# Altium PCB regularCharger.PcbDoc
Units mm, origin at the board's own origin, x right, y up, seen from the top; angles counter-clockwise.
Board outline 152.4 x 101.6 mm, 2 copper layers (Top Layer, Bottom Layer); 12 components, 7 nets, 32 pads, 0 vias.
Unrouted connection lines stored in the file: 13.
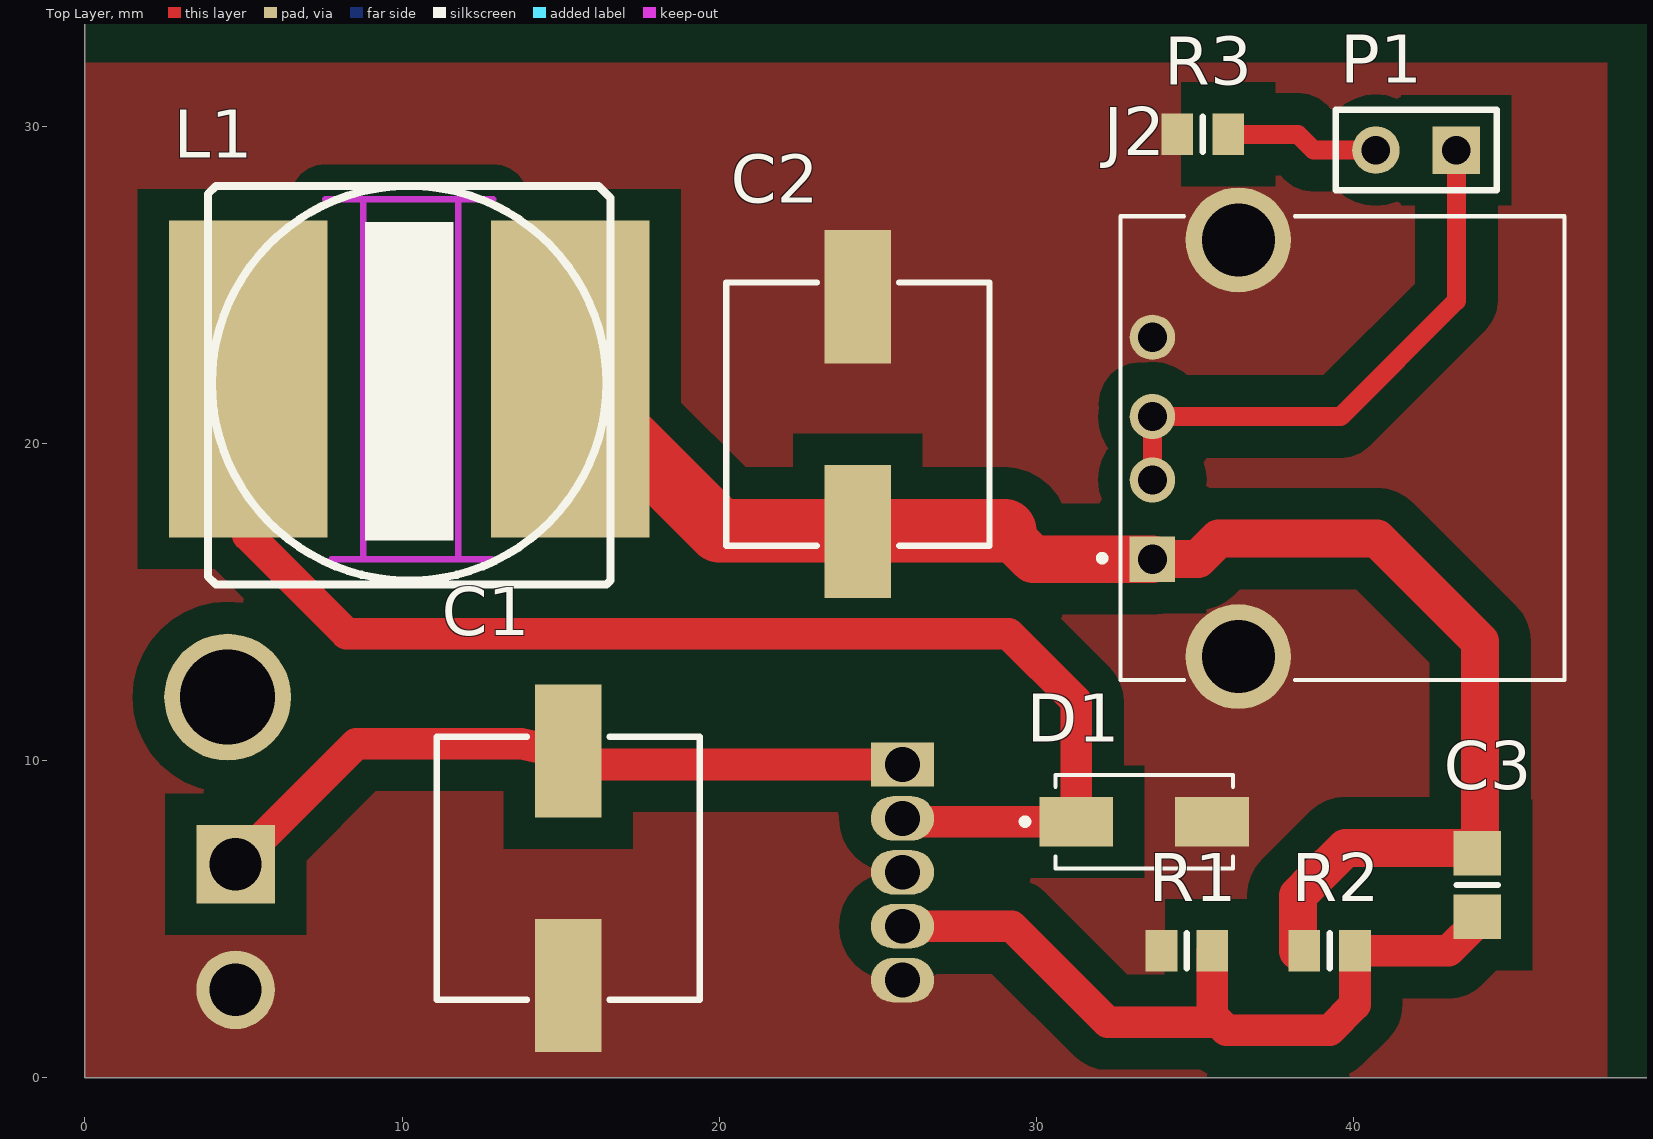
[diagram p0: Top Layer view]
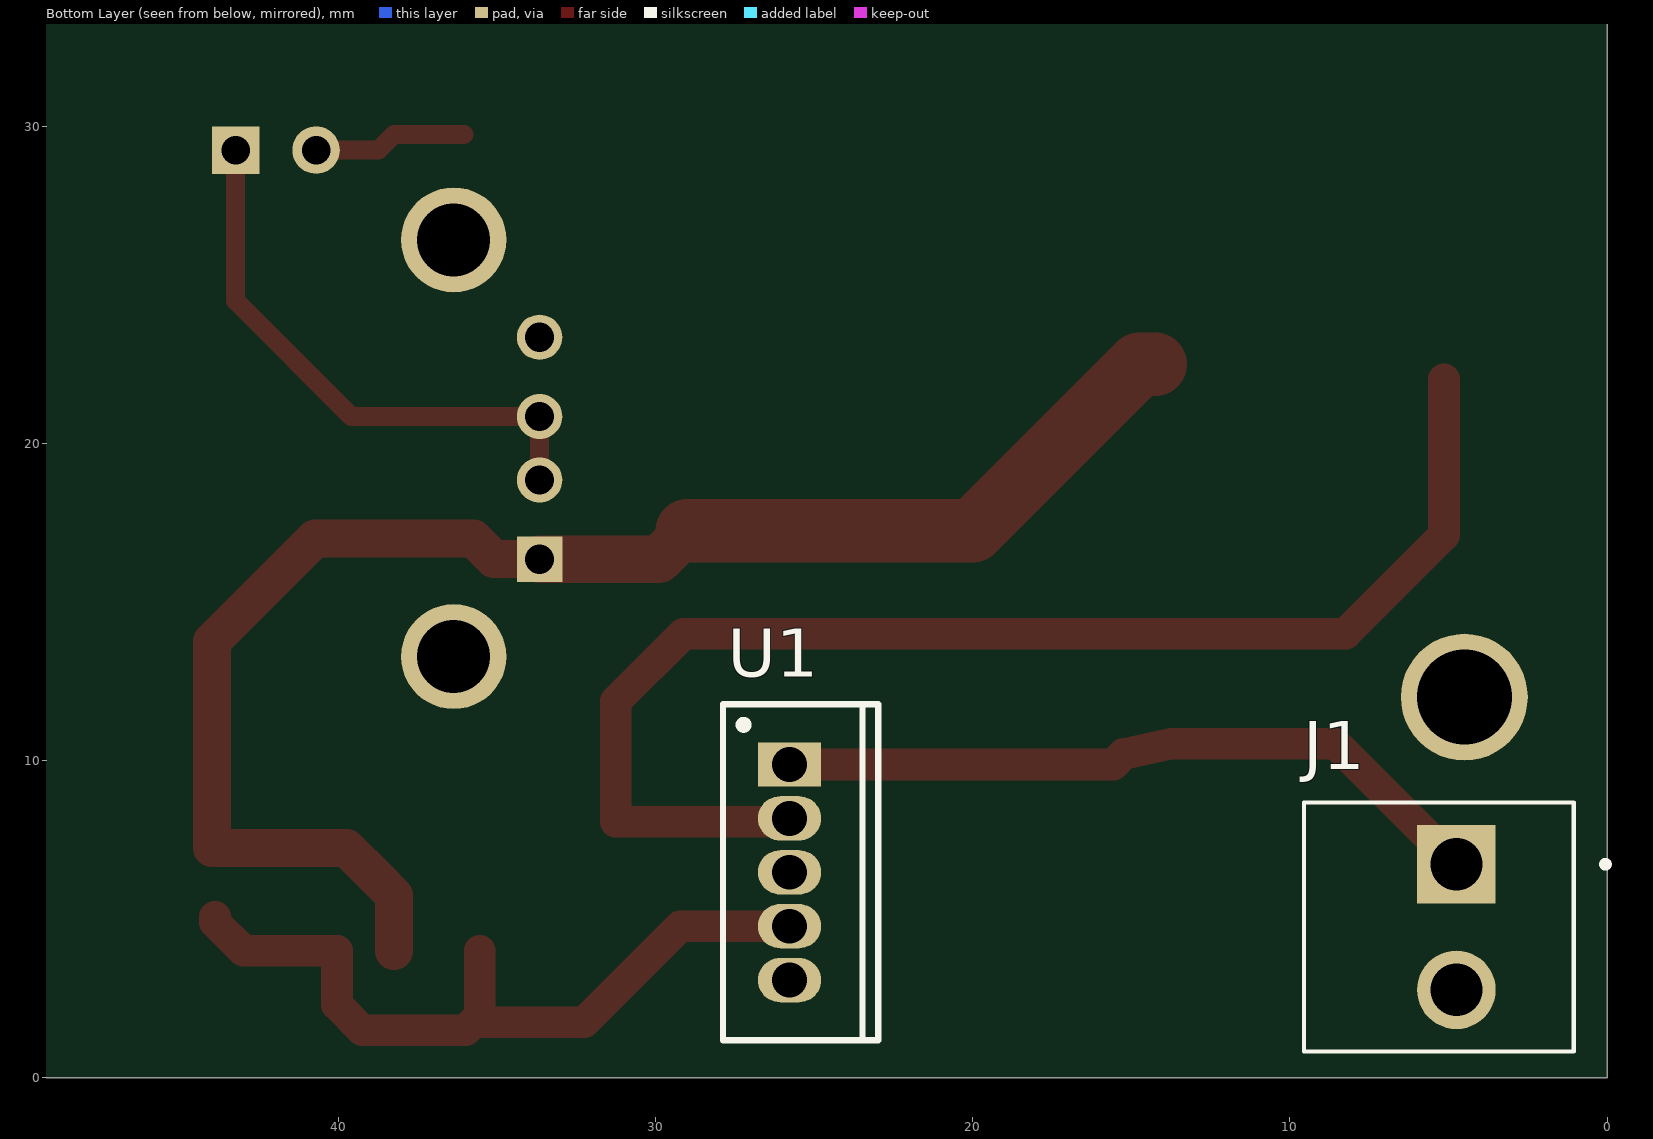
[diagram p1: Bottom Layer view, seen from below]

## Layer stack, top to bottom
Top Solder: solder mask 0.0102, Solder Resist, Dk 3.5
Top Layer: signal copper 0.0356
Dielectric 1: dielectric 0.32, FR-4, Dk 4.8
Bottom Layer: signal copper 0.0356
Bottom Solder: solder mask 0.0102, Solder Resist, Dk 3.5

## Board outline
0,0 152.4,0 152.4,101.6 0,101.6

## Design rules (kind name [scope] priority, off if disabled: settings)
Clearance [All] p1: gap=1 ignorepadtopadclearanceinfootprint=FALSE
PolygonConnect [All] p1: connectstyle=Direct reliefconductorwidth=0.254 reliefentries=4 polygonreliefangle="90 Angle" airgapwidth=0.254
RoomDefinition regularCharger [InComponentClass('regularCharger')] p1: confinementstyle=ConfineIn formatcopy=TRUE lockcomponents=FALSE outline 153.6,1.85 156.6,1.85 156.6,10.1 153.6,10.1
RoutingVias [All] p1: holewidth=0.711 width=1.27 viastyle="Through Hole" minholewidth=0.711 minwidth=1.27 maxholewidth=0.711 maxwidth=1.27
SolderMaskExpansion [All] p1: expansion=0.102
Width [All] p1: maxlimit=0.254 minlimit=0.254 preferedwidth=0.254
30 further rules are at their usual default settings.

## Components (designator, comment, footprint, x,y, rotation, side; value= is the part's Value field where it differs from the comment)
C1 "100uf" *HAV(F) 15.24,6.604 r270 top
C2 "220uf" *HAV(F) 24.375,20.925 r90 top
C3 "Cap" 6-0805_M 43.9,6.075 r270 top value=10nf
D1 "S1M" *DIOM5227X270N_S1M(Primary) 33.4,8.075 r0 top
J1 "6-1123723-2" *TE_6-1123723-2 4.75,4.75 r270 bottom
J2 "1-292303-1" *TE_1-292303-1_1-292303-1(Primary) 39.652,19.85 r90 top
L1 "Inductor" IND_SMD-13.0mm 10.225,21.9 r180 top value=33uH
P1 "Header 2" HDR1X2 43.25,29.25 r180 top
R1 "Res1" 6-0805_L 34.75,4 r0 top value=1K
R2 "Res1" 6-0805_L 39.25,4 r180 top value=3K
R3 "Res1" 6-0805_L 35.25,29.75 r0 top value=10K
U1 "LM2596-ADJ" T05A 25.781,6.477 r270 bottom

## Footprints (in the part's own frame and the unit in brackets; to place one, negate y for a bottom-side part, rotate by r counter-clockwise, add the part's x,y. Pads: shape width x height; smd on the part's side, far side on the other; paste and mask are expansions set on the pad)
6-0805_L [mm] "Chip Resistor, Body 2.0x1.2mm, IPC High Density"
  rect 1x1.3 smd: 1(-0.8,0) 2(0.8,0)
  silkscreen extent 0,-0.55 0,0.55, body extent -1.07,-0.7 1.07,0.7, height 0.7
6-0805_M [mm] "Chip Resistor, Body 2.0x1.2mm, IPC Low Density"
  rect 1.4x1.5 smd: 1(-1,0) 2(1,0)
  silkscreen extent 0,-0.65 0,0.65, body extent -1.07,-0.7 1.07,0.7, height 0.7
*DIOM5227X270N_S1M(Primary) [mm]
  rect 2.33x1.56 smd: A(2.14,0) C(-2.14,0)
  silkscreen extent -3.85,-1.48 2.8,1.48
*HAV(F) [mm]
  rect 4.2x2.1 smd: 1(-3.7,0) 2(3.7,0)
  silkscreen extent -4.15,-4.15 4.15,4.15
*TE_1-292303-1_1-292303-1(Primary) [mm]
  rect 1.428x1.428 hole 0.92: 1(-3.5,5.99)
  round 1.428 hole 0.92: 2(-1,5.99) 3(1,5.99) 4(3.5,5.99)
  round 3.316 hole 2.3: S1(-6.57,3.28) S2(6.57,3.28)
  silkscreen extent -7.31,-7 7.31,7.67
*TE_6-1123723-2 [mm]
  rect 2.475x2.475 hole 1.65: 1(-1.98,0)
  round 2.475 hole 1.65: 2(1.98,0)
  silkscreen extent -3.93,-4.8 3.93,4.8
HDR1X2 [mm] "Connector; Header; 2 Position"
  rect 1.5x1.5 hole 0.9: 1(0,0)
  round 1.5 hole 0.9: 2(2.54,0)
  silkscreen extent -1.27,-1.27 3.81,1.27
IND_SMD-13.0mm [mm]
  rect 5x10 smd: 1(-5.08,-0.127) 2(5.08,-0.127)
  Top Layer keep-out lines w0.2: 2.65,-5.8 -2.65,-5.8 ; 2.45,5.55 -2.6,5.55 ; 1.45,5.5 1.45,-5.75 ; -1.55,5.55 -1.55,-5.8
  silkscreen extent -6.35,-6.22 6.35,6.35, body extent -6.2,-6.3 6.3,6.2, height 6.1
T05A [mm] "TO, Thru-Hole, Vertical, Heatsink Mounted; 5 In-Line Leads; Pitch 1.70 mm"
  rect 1.4x2 hole 1.1: 1(-3.4,0)
  oval 1.4x2 hole 1.1: 2(-1.7,0) 3(0,0) 4(1.7,0) 5(3.4,0)
  silkscreen extent -5.3,-2.1 5.3,2.8, body extent -5.35,-2.15 5.35,2.85, height 15.9

## Part data
C1 C2: library part EEEHA1H101UP, "Cap Aluminum 100uF 50V 20% _8 X 10.2mm_ SMD 110mA 2000 hr 105°C T/R", Package="Radial Panasonic Electronic", Availability=Unavailable, MF="Panasonic Electronic", MP=EEEHA1H101UP, Price=None, SnapEDA_Link=https://www.snapeda.com/parts/EEEHA1H101UP/Panasonic%20Electronic%20Components/view-part/?ref=snap
C3: "Capacitor", LatestRevisionDate=17-Jul-2002, LatestRevisionNote="Re-released for DXP Platform.", PackageDescription="Radial Cap, Thru-Hole; 2 Leads; 0.3 in Pin Spacing", PackageReference=RAD-0.3, Published=8-Jun-2000, Publisher="Altium Limited"
D1: "S1 Series 1000 V 1 A 1 uA Surface Mount General Purpose Rectifier - DO-214AC", Package="DO-214AC-214 ON Semiconductor", Availability=Unavailable, MF="ON Semiconductor", MP=S1M, Price=None, SnapEDA_Link=https://www.snapeda.com/parts/S1M/ON%20Semiconductor/view-part/?ref=snap
J1: "3.96 EP HDR ASSY 2P_GREEN_", Package=None, Availability=Unavailable, Centerline_Pitch="3.96 mm[.156 in]", EU_RoHS_Compliance=Compliant, MF="TE Connectivity", MP=6-1123723-2, Number_of_Positions=2, Price=None, Product_Type=Header, SnapEDA_Link=https://www.snapeda.com/parts/6-1123723-2/TE%20Connectivity%20AMP%20Connectors/view-part/?ref=snap, TE_purchase_URL=https://www.te.com/usa-en/product-6-1123723-2.html?te_bu=Cor&te_type=disp&te_campaign=seda_glo_cor-seda-global-disp-prtnr-fy19-seda-model-bom-cta_sma-317_1&elqCampaignId=32493
J2: "Conn USB 2.0 Type A RCP 4 POS Solder RA SMD 4 Terminal 1 Port Box/Tray", Package=None, Availability=Unavailable, EU_RoHS_Compliance=Compliant, MF="TE Connectivity", MP=1-292303-1, Price=None, SnapEDA_Link=https://www.snapeda.com/parts/1-292303-1/TE%20Connectivity%20AMP%20Connectors/view-part/?ref=snap, TE_purchase_URL=https://www.te.com/usa-en/product-1-292303-1.html?te_bu=Cor&te_type=disp&te_campaign=seda_glo_cor-seda-global-disp-prtnr-fy19-seda-model-bom-cta_sma-317_1&elqCampaignId=32493
P1: "Header, 2-Pin", LatestRevisionDate=17-Jul-2002, LatestRevisionNote="Re-released for DXP Platform.", Publisher="Altium Limited"
R1 R2 R3: "Resistor", LatestRevisionDate=17-Jul-2002, LatestRevisionNote="Re-released for DXP Platform.", PackageDescription="Axial Device, Thru-Hole; 2 Leads; 0.3 in Pin Spacing", PackageReference=AXIAL-0.3, Published=8-Jun-2000, Publisher="Altium Limited"
U1: library part MOSFET-N3, "Two-Gate, N-Channel MOSFET, Externally Terminated Substrate", Code_JEDEC=TS-001-AA, LatestRevisionDate=17-Jul-2002, LatestRevisionNote="Re-released for DXP Platform.", PackageDescription="TO-220, Molded, 5 Lead, Straight", PackageReference=T05A, Published=24-Mar-1999, Publisher="Altium Limited"
L1: Code_IEC=1005, Code_JEITA=0402, LatestRevisionDate=29-May-2009, LatestRevisionNote="IPC-7351 Footprint Added.", PackageDescription="Chip Inductor", PackageReference=0402-A, Published=8-Jun-2000, Publisher="Altium Limited"

## Free pads (board coordinates)
  round 4 hole 3: 15(4.5,12)

## Nets (pads, with @x,y where several pads share a name; then routed paths per layer and width w, separated by ;. In a path a pad name is that pad's centre, name@x,y a point inside that pad or via, vN(x,y) a via of type N, cw(c..) or ccw(c..) an arc to the next point about the centre after c; other vN are vias at no path point)
GND: C1.2 C2.2 D1.A J1.2 J2.4 J2.S1 J2.S2 R1.1 R3.1 U1.3 U1.5
NetC3_2: C3.2 R1.2 R2.1 U1.4
NetD1_C: D1.C L1.2 U1.2
NetJ2_2: J2.2 J2.3 P1.1
NetP1_2: P1.2 R3.2
V_OUT: C2.1 C3.1 J2.1 L1.1 R2.2
VIN: C1.1 J1.1 U1.1 | length 22.8
  Top Layer w1: J1.1 8.554,10.534 13.74,10.534 15.221,10.214 15.24,10.21 15.573,9.877 U1.1
copper on no net: | length 137.8
  Top Layer w0.6: 33.662,18.85 33.662,20.85 39.6,20.85 43.25,24.5 43.25,29.25 ; 36.05,29.75 38.25,29.75 38.75,29.25 40.71,29.25
  Top Layer w1: 5.145,22.027 5.145,17.105 8.25,14 8.5,14 29.125,14 31.26,11.865 31.26,8.075 25.883,8.075 ; 25.781,4.777 29.223,4.777 32.25,1.75 35.5,1.75 ; 35.55,4 35.55,1.95 36,1.5 39.25,1.5 40.05,2.3 40.05,4 43,4 43.9,4.9 43.9,5.075
  Top Layer w1.2: 33.662,16.35 35.1,16.35 35.75,17 40.75,17 44,13.75 44,7.25 39.75,7.25 38.75,6.25 38.25,5.75 38.25,4
  Top Layer w1.5: 29,17.25 29.9,16.35 33.662,16.35
  Top Layer w2: 14.25,22.5 14.75,22.5 20,17.25 29,17.25

## Polygon pours and split planes (outlines as drawn)
GND on Top Layer "Top Layer-GND" (solid, remove dead copper, pour order 0): 0,0 48,0 48,32 0,32